# Altium PCB hdmi.PcbDoc
Units mm, origin at the board's own origin, x right, y up, seen from the top; angles counter-clockwise.
Board outline 51.37 x 51.66 mm, 2 copper layers (Top Layer, Bottom Layer); 54 components, 43 nets, 112 pads, 0 vias.
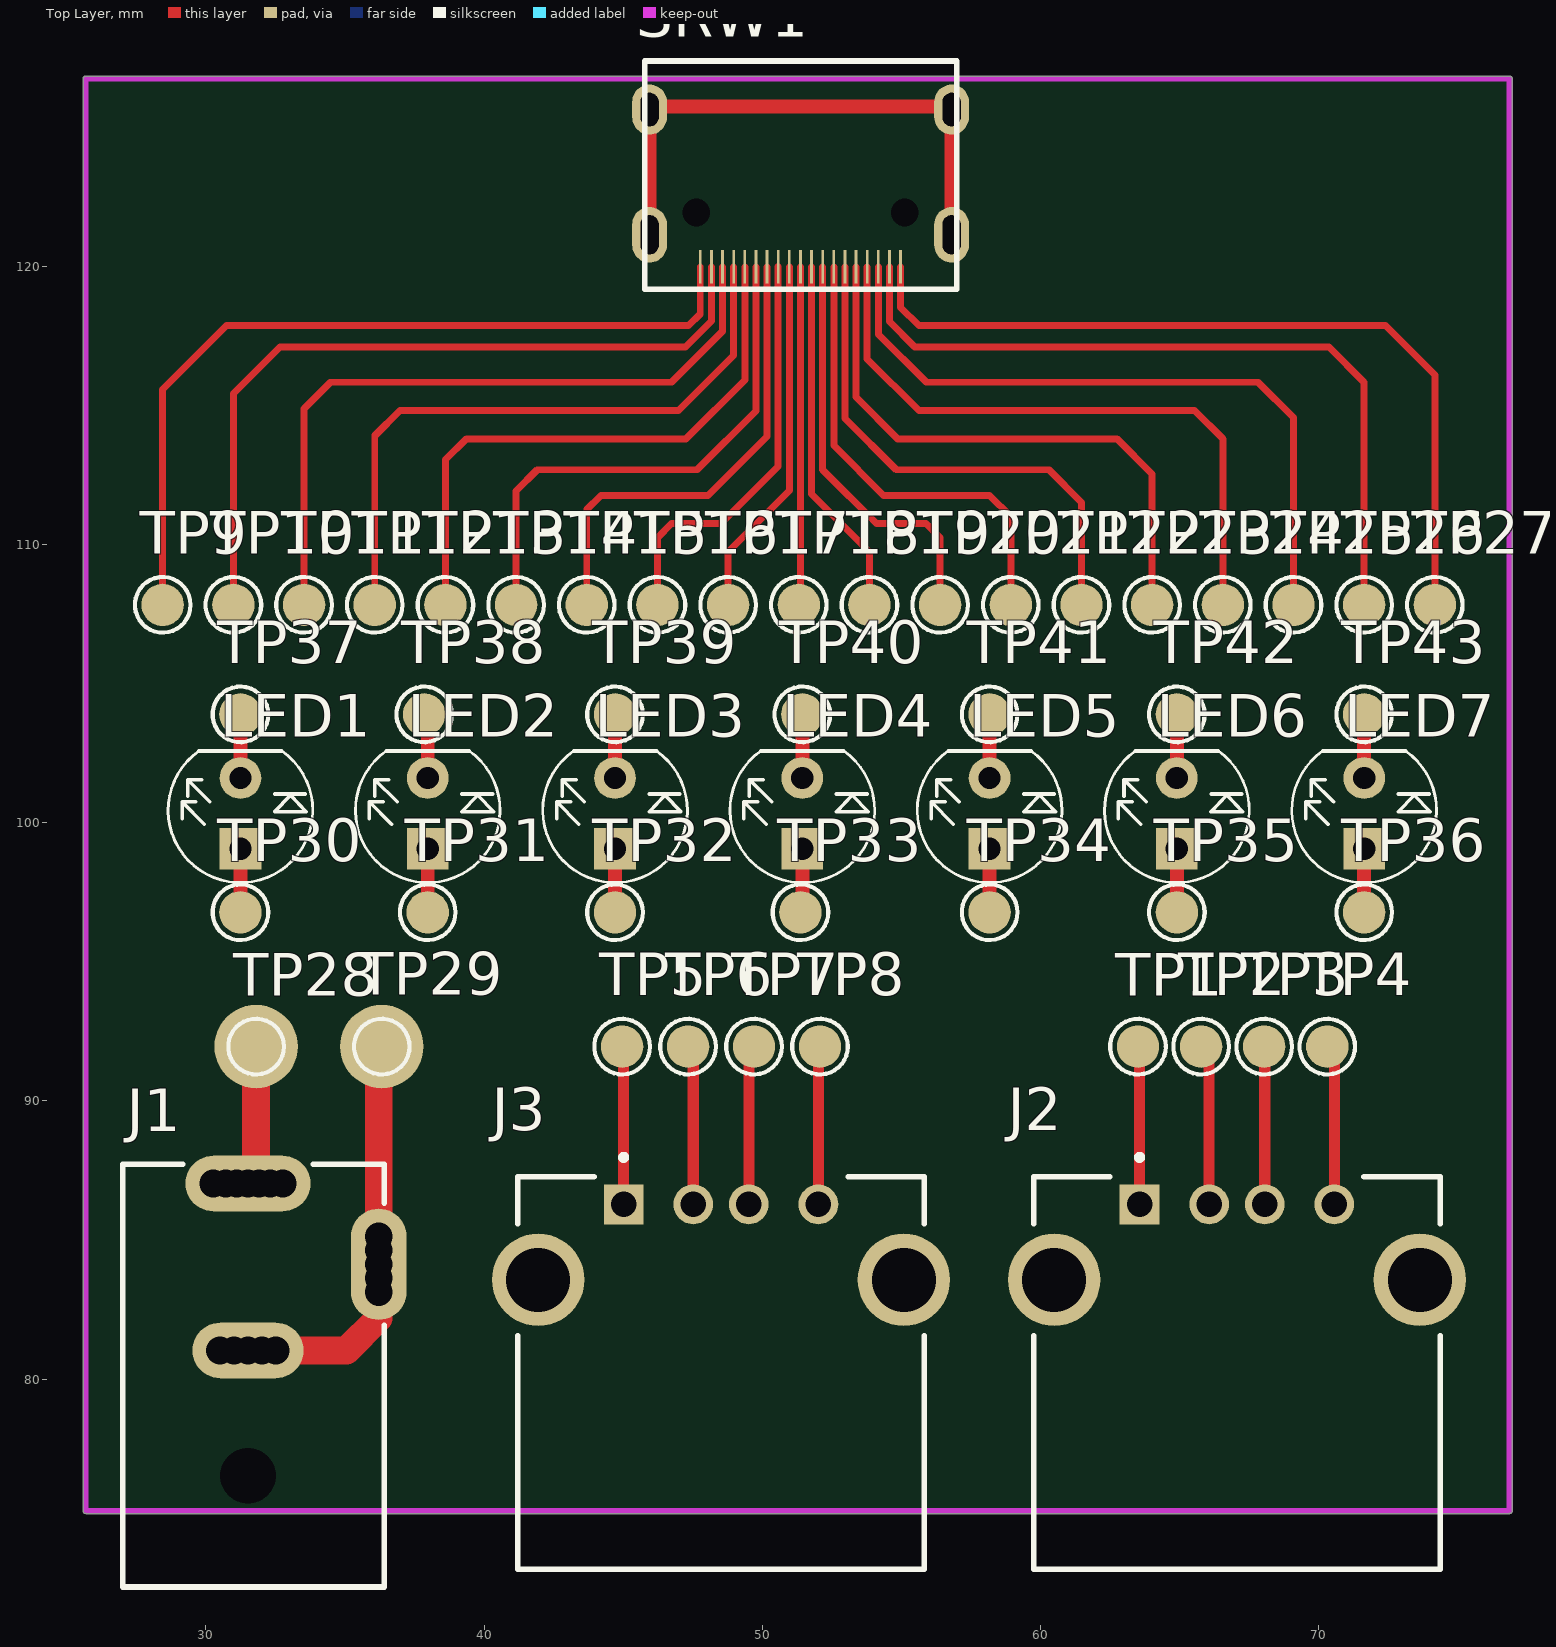
[diagram p0: Top Layer view]
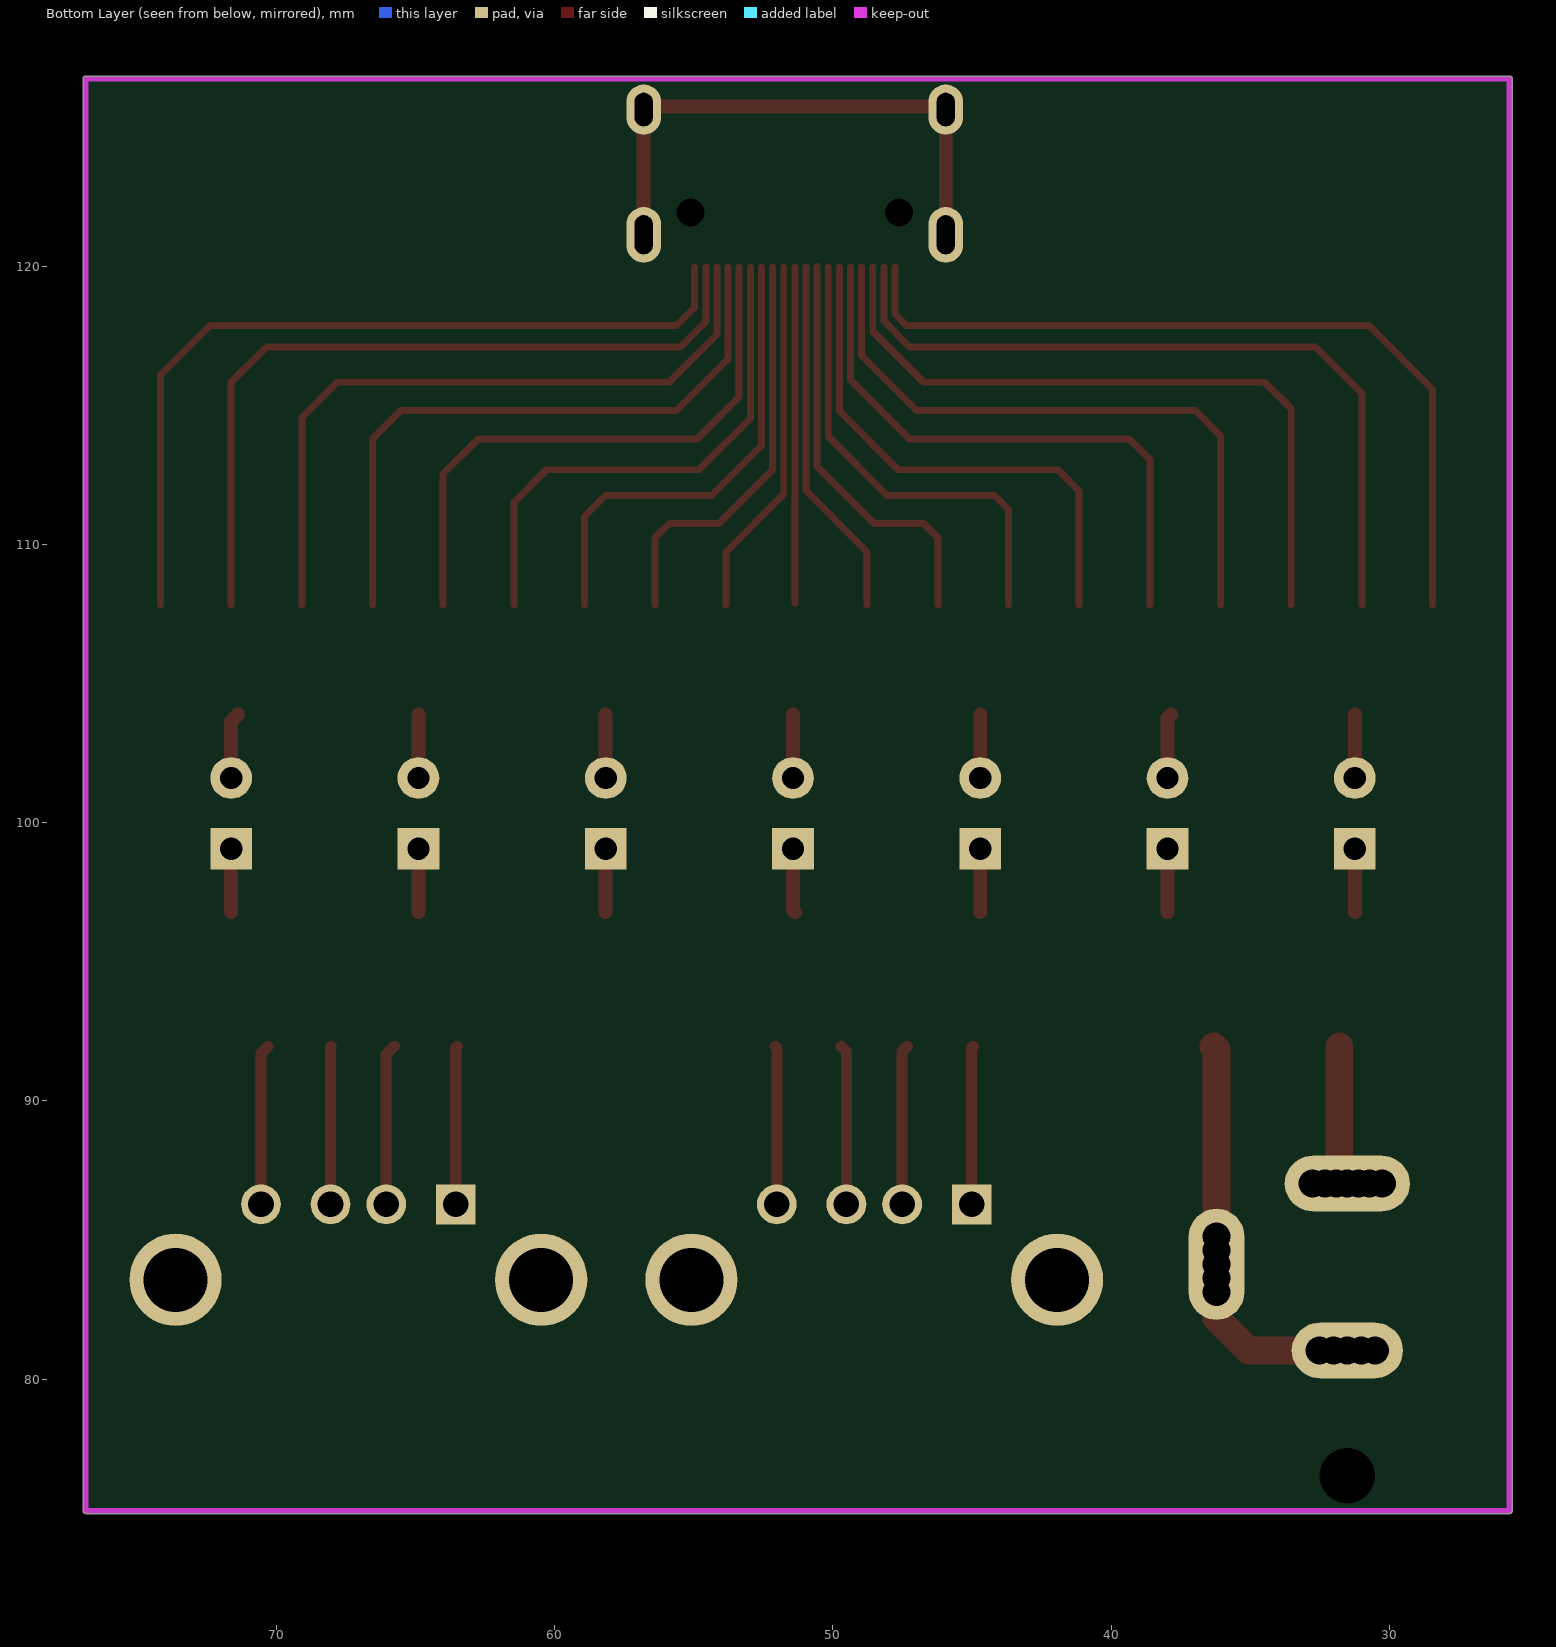
[diagram p1: Bottom Layer view, seen from below]
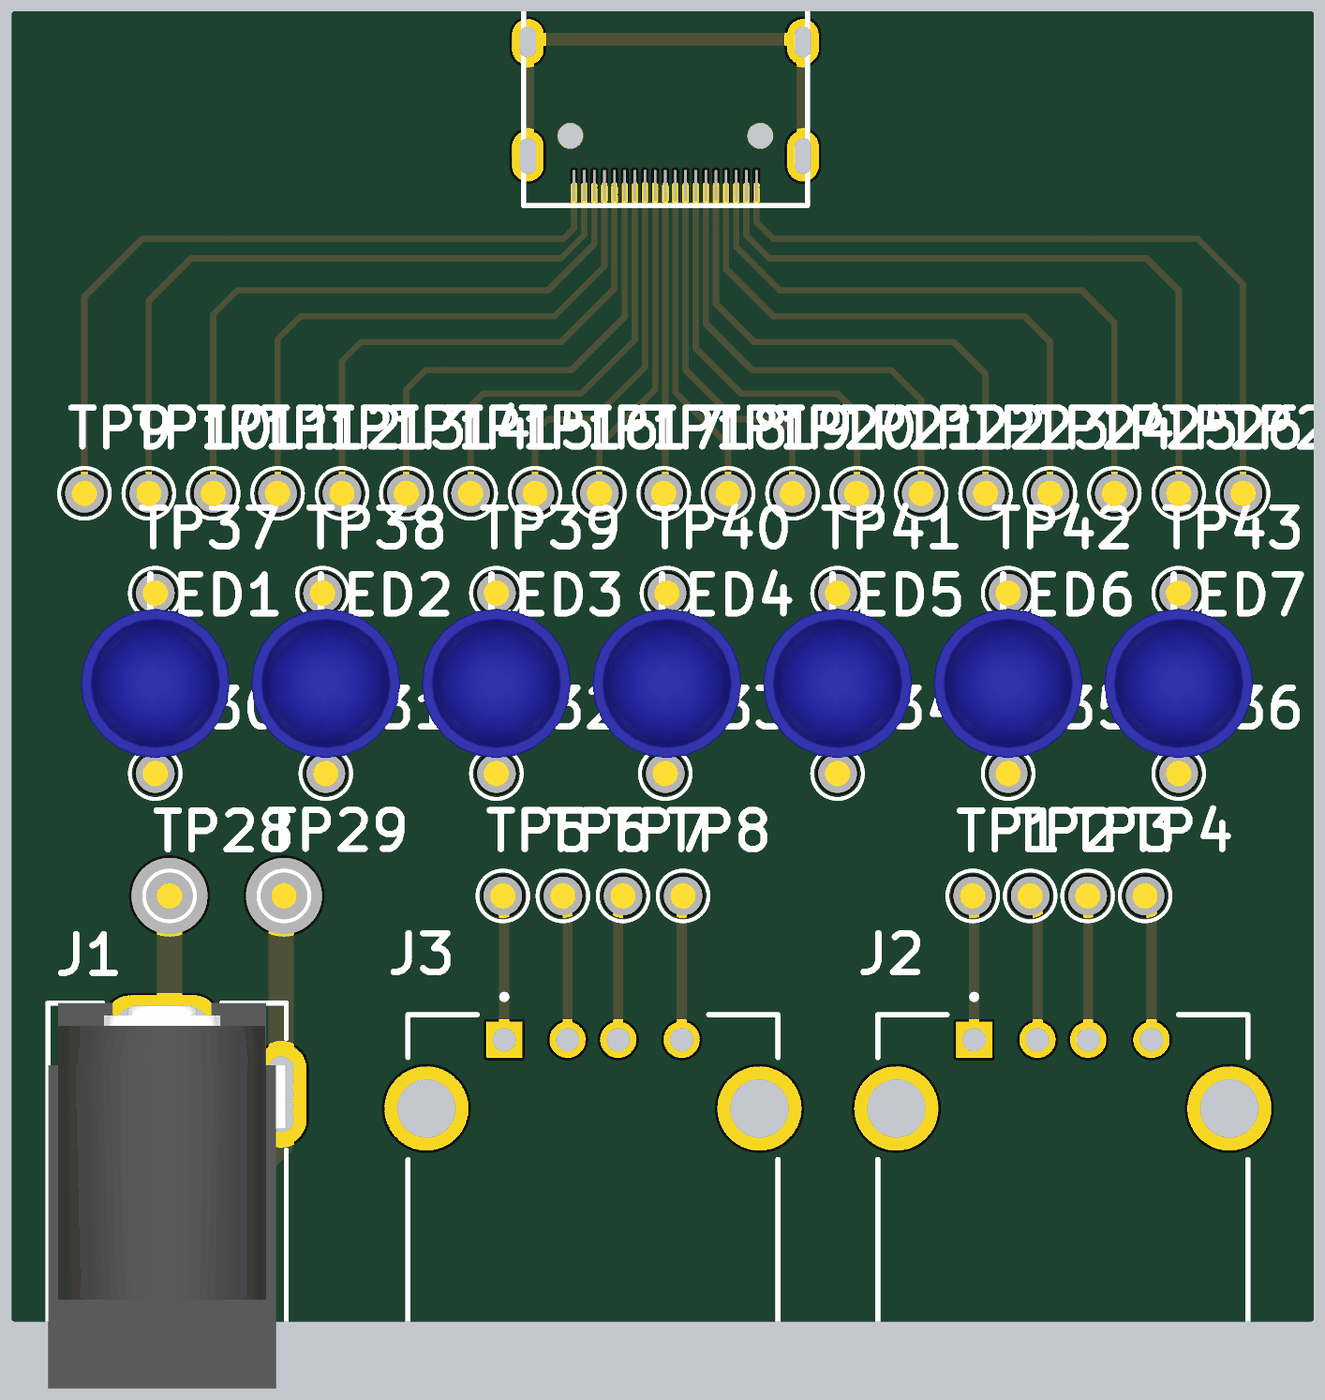
[diagram p2: 3D render of the assembled board from above, using the file's embedded part models]

## Layer stack, top to bottom
Top Solder: solder mask 0.0102, Solder Resist, Dk 3.5
Top Layer: signal copper 0.0356
Dielectric 1: dielectric 0.32, FR-4, Dk 4.8
Bottom Layer: signal copper 0.0356
Bottom Solder: solder mask 0.0102, Solder Resist, Dk 3.5

## Board outline
25.685,75.166 cw(c25.685,75.267) 25.584,75.267 25.584,126.725 cw(c25.685,126.725) 25.685,126.826 76.85,126.826 cw(c76.85,126.725) 76.951,126.725 76.951,75.267 cw(c76.85,75.267) 76.85,75.166 cw(c76.85,75.267) 76.85,75.166 cw(c76.85,75.267) 76.85,75.166

## Design rules (kind name [scope] priority, off if disabled: settings)
Clearance [All] p1: gap=0.1 ignorepadtopadclearanceinfootprint=FALSE except(0.7: Arc-Poly Track-Poly SMDPad-Poly THPad-Poly Via-Poly Fill-Poly Poly-Poly)
PolygonConnect [All] p1: connectstyle=Relief reliefconductorwidth=0.254 reliefentries=4 polygonreliefangle="90 Angle" airgapwidth=0.254
RoutingVias [All] p1: holewidth=0.711 width=1.27 viastyle="Through Hole" minholewidth=0.711 minwidth=1.27 maxholewidth=0.711 maxwidth=1.27
SolderMaskExpansion [All] p1: expansion=0.102
Width [All] p1: maxlimit=10 minlimit=0.1 preferedwidth=0.1
30 further rules are at their usual default settings.

## Components (designator, comment, footprint, x,y, rotation, side; value= is the part's Value field where it differs from the comment)
J1 "Power jack" "Power Jack" 33.237,81.776 r90 top
J2 "USB-A-S-X-X-TH" SAMTEC_USB-A-S-X-X-TH 67.056,83.566 r0 top
J3 "USB-A-S-X-X-TH" SAMTEC_USB-A-S-X-X-TH 48.514,83.566 r0 top
LED1 "LED 2PIN" "LED 5mm" 31.242,100.33 r90 top
LED2 "LED 2PIN" "LED 5mm" 37.973,100.33 r90 top
LED3 "LED 2PIN" "LED 5mm" 44.704,100.33 r90 top
LED4 "LED 2PIN" "LED 5mm" 51.435,100.33 r90 top
LED5 "LED 2PIN" "LED 5mm" 58.166,100.33 r90 top
LED6 "LED 2PIN" "LED 5mm" 64.897,100.33 r90 top
LED7 "LED 2PIN" "LED 5mm" 71.628,100.33 r90 top
SRW1 "Screw" "mini hdmi socket" 56.978,127.368 r180 top
TP1 "TEST POINT" "Test Point On Top"#1 63.5,91.948 r0 top
TP2 "TEST POINT" "Test Point On Top"#1 65.767,91.948 r0 top
TP3 "TEST POINT" "Test Point On Top"#1 68.035,91.948 r0 top
TP4 "TEST POINT" "Test Point On Top"#1 70.302,91.948 r0 top
TP5 "TEST POINT" "Test Point On Top"#1 44.958,91.948 r0 top
TP6 "TEST POINT" "Test Point On Top"#1 47.329,91.948 r0 top
TP7 "TEST POINT" "Test Point On Top"#1 49.699,91.948 r0 top
TP8 "TEST POINT" "Test Point On Top"#1 52.07,91.948 r0 top
TP9 "TEST POINT" "Test Point On Top"#1 28.448,107.823 r0 top
TP10 "TEST POINT" "Test Point On Top"#1 30.988,107.823 r90 top
TP11 "TEST POINT" "Test Point On Top"#1 33.528,107.823 r90 top
TP12 "TEST POINT" "Test Point On Top"#1 36.068,107.823 r90 top
TP13 "TEST POINT" "Test Point On Top"#1 38.608,107.823 r90 top
TP14 "TEST POINT" "Test Point On Top"#1 41.148,107.823 r90 top
TP15 "TEST POINT" "Test Point On Top"#1 43.688,107.823 r90 top
TP16 "TEST POINT" "Test Point On Top"#1 46.228,107.823 r90 top
TP17 "TEST POINT" "Test Point On Top"#1 48.768,107.823 r90 top
TP18 "TEST POINT" "Test Point On Top"#1 51.308,107.823 r90 top
TP19 "TEST POINT" "Test Point On Top"#1 53.848,107.823 r90 top
TP20 "TEST POINT" "Test Point On Top"#1 56.388,107.823 r90 top
TP21 "TEST POINT" "Test Point On Top"#1 58.928,107.823 r90 top
TP22 "TEST POINT" "Test Point On Top"#1 61.468,107.823 r90 top
TP23 "TEST POINT" "Test Point On Top"#1 64.008,107.823 r90 top
TP24 "TEST POINT" "Test Point On Top"#1 66.548,107.823 r90 top
TP25 "TEST POINT" "Test Point On Top"#1 69.088,107.823 r90 top
TP26 "TEST POINT" "Test Point On Top"#1 71.628,107.823 r90 top
TP27 "TEST POINT" "Test Point On Top"#1 74.168,107.823 r90 top
TP28 "TEST POINT" "Test Point On Top"#2 31.804,91.948 r90 top
TP29 "TEST POINT" "Test Point On Top"#2 36.322,91.948 r90 top
TP30 "TEST POINT" "Test Point On Top"#1 31.242,96.774 r90 top
TP31 "TEST POINT" "Test Point On Top"#1 37.973,96.774 r90 top
TP32 "TEST POINT" "Test Point On Top"#1 44.704,96.774 r90 top
TP33 "TEST POINT" "Test Point On Top"#1 51.368,96.774 r90 top
TP34 "TEST POINT" "Test Point On Top"#1 58.166,96.774 r90 top
TP35 "TEST POINT" "Test Point On Top"#1 64.897,96.774 r90 top
TP36 "TEST POINT" "Test Point On Top"#1 71.628,96.774 r90 top
TP37 "TEST POINT" "Test Point On Top"#1 31.242,103.886 r90 top
TP38 "TEST POINT" "Test Point On Top"#1 37.846,103.886 r90 top
TP39 "TEST POINT" "Test Point On Top"#1 44.704,103.886 r90 top
TP40 "TEST POINT" "Test Point On Top"#1 51.435,103.886 r90 top
TP41 "TEST POINT" "Test Point On Top"#1 58.166,103.886 r90 top
TP42 "TEST POINT" "Test Point On Top"#1 64.897,103.886 r90 top
TP43 "TEST POINT" "Test Point On Top"#1 71.628,103.886 r90 top

## Footprints (in the part's own frame and the unit in brackets; to place one, negate y for a bottom-side part, rotate by r counter-clockwise, add the part's x,y. Pads: shape width x height; smd on the part's side, far side on the other; paste and mask are expansions set on the pad)
"LED 5mm" [mm]
  rect 1.5x1.5 hole 0.8: 1(-1.27,0)
  round 1.5 hole 0.8: 2(1.27,0)
  silkscreen extent -2.49,-2.6 2.24,2.6, body extent -2.95,-2.95 2.95,2.95, height 13.6
"mini hdmi socket" [mm]
  rect 0.1x1.2 smd: 1(2.01,7.395) 2(2.41,7.395) 3(2.81,7.395) 4(3.21,7.395) 5(3.61,7.395) 6(4.01,7.395) 7(4.41,7.395) 8(4.81,7.395) 9(5.21,7.395) 10(5.61,7.395) 11(6.01,7.395) 12(6.41,7.389) 13(6.81,7.395) 14(7.21,7.395) 15(7.61,7.395) 16(8.01,7.395) 17(8.41,7.395) 18(8.81,7.395) 19(9.21,7.395)
  round 0.1 hole 1: 5(1.86,5.448) 5(9.357,5.448)
  oval 1.25x1.8 hole 1.2 slot 0.65 at 0 deg: 20(0.177,1.745) 20(11.033,1.745)
  oval 1.25x2 hole 1.4 slot 0.65 at 0 deg: 20(0.177,6.245) 20(11.033,6.245)
  Top Layer lines w0.2: 11.033,6.245 11.015,6.245 ; 1.855,5.448 1.849,5.448 ; 9.362,5.448 9.361,5.448 ; 9.362,5.438 9.361,5.438
  silkscreen extent 0,0 11.2,8.2
"Power Jack" [mm] "Power Adaptor Jack"
  round 1.5 hole 1: 1(5.25,0.475) 1(5.25,0.925) 1(5.25,1.325) 1(5.25,2.125) 1(5.25,2.525) 1(5.25,2.975) 2(-0.75,2.725) 2(-0.75,0.725) 2(-0.75,2.225) 2(-0.75,1.225) 3(1.35,-2.975) 3(1.85,-2.975) 3(2.85,-2.975) 3(3.35,-2.975)
  oval 2x4.5 hole 1: 1(5.25,1.725)
  oval 2x4 hole 1: 2(-0.75,1.725)
  oval 4x2 hole 1: 3(2.35,-2.975)
  round 1.9 hole 2: MH(-5.25,1.725)
  silkscreen extent -9.25,-3.18 5.95,6.23, body extent -9.25,-3.17 5.95,6.23, height 11
SAMTEC_USB-A-S-X-X-TH [mm]
  rect 1.428x1.428 hole 0.92: 01(-3.5,2.71)
  round 1.428 hole 0.92: 02(-1,2.71) 03(1,2.71) 04(3.5,2.71)
  round 3.316 hole 2.3: S1(-6.57,0) S2(6.57,0)
  silkscreen extent -7.3,-10.4 7.3,4.5
"Test Point On Top"#1 [mil]
  round 60 smd: 1(0,0)
  silkscreen extent -39,-39 39,39, body extent -20,-20 20,20, height 256
"Test Point On Top"#2 [mil]
  round 118.11 smd: 1(0,0)
  silkscreen extent -39,-39 39,39, body extent -20,-20 20,20, height 256

## Part data
J2 J3: "USB-A (USB TYPE-A) USB 2.0 Receptacle Connector 4 Position Through Hole, Right Angle", Package=None, Digi-Key_Part_Number=SAM10373-ND, MF=Samtec, MP=USB-A-S-S-W-TH, SnapEDA_Link=https://www.snapeda.com/parts/USB-A-S-S-W-TH/Samtec%20Inc./view-part/423470/?ref=snap, Toby_UK-Purchase-URL=https://snapeda.com/shop?store=Toby+UK&id=423470
J1: ="Power jack"
LED1 LED2 LED3 LED4 LED5 LED6 LED7: ="LED 5mm"
SRW1: ="Screw 3mm"
TP1 TP2 TP3 TP4 TP5 TP6 TP7 TP8 TP9 TP10 TP11 TP12 TP13 TP14 TP15 TP16 TP17 TP18 TP19 TP20 TP21 TP22 TP23 TP24 TP25 TP26 TP27 TP28 TP29 TP30 TP31 TP32 TP33 TP34 TP35 TP36 TP37 TP38 TP39 TP40 TP41 TP42 TP43: ="Test point one pin"

## Nets (pads, with @x,y where several pads share a name; then routed paths per layer and width w, separated by ;. In a path a pad name is that pad's centre, name@x,y a point inside that pad or via, vN(x,y) a via of type N, cw(c..) or ccw(c..) an arc to the next point about the centre after c; other vN are vias at no path point)
GND: J1.2 J1.3 TP29.1 | length 15.5
  Top Layer w1: J1.2@30.512,81.026 31.512,81.026 32.512,81.026 35.052,81.026 36.212,82.186 36.212,83.126 J1.3@36.212,83.626 ; J1.3@36.212,84.126 36.212,84.626 36.212,85.126 36.212,91.838 TP29.1
hdmi_1: TP27.1 | length 29.9
  Top Layer w0.25: 54.968,119.974 54.968,118.514 55.626,117.856 72.39,117.856 74.168,116.078 TP27.1
hdmi_2: TP26.1 | length 27.9
  Top Layer w0.25: 54.568,119.974 54.568,118.002 55.476,117.094 70.358,117.094 71.628,115.824 TP26.1
hdmi_3: TP25.1 | length 25.3
  Top Layer w0.25: 54.168,119.974 54.168,117.547 55.891,115.824 67.818,115.824 69.088,114.554 TP25.1
hdmi_4: TP24.1 | length 23.2
  Top Layer w0.25: 53.768,119.974 53.768,116.666 55.626,114.808 65.532,114.808 66.548,113.792 TP24.1
hdmi_5: TP23.1 | length 21.2
  Top Layer w0.25: 53.368,119.974 53.368,115.288 54.864,113.792 62.738,113.792 64.008,112.522 TP23.1
hdmi_6: TP22.1 | length 18.9
  Top Layer w0.25: 52.968,119.974 52.968,114.522 54.811,112.678 60.296,112.678 61.468,111.506 TP22.1
hdmi_7: TP21.1 | length 17
  Top Layer w0.25: 52.568,119.974 52.568,113.548 54.356,111.76 58.166,111.76 58.928,110.998 TP21.1
hdmi_8: TP20.1 | length 14.9
  Top Layer w0.25: 52.168,119.974 52.168,112.678 54.102,110.744 55.88,110.744 56.388,110.236 TP20.1
hdmi_9: TP19.1 | length 13
  Top Layer w0.25: 51.768,119.974 51.768,111.808 53.848,109.728 TP19.1
hdmi_10: TP18.1 | length 12.2
  Top Layer w0.1: TP18.1 TP18.1@51.368,107.883
  Top Layer w0.25: TP18.1@51.368,107.883 51.368,119.974
hdmi_11: TP17.1 | length 13.1
  Top Layer w0.25: TP17.1 48.768,109.728 50.968,111.928 50.968,119.974
hdmi_12: TP16.1 | length 15
  Top Layer w0.25: TP16.1 46.228,110.236 46.736,110.744 48.514,110.744 50.568,112.798 50.568,119.979
hdmi_13: TP15.1 | length 17.1
  Top Layer w0.25: TP15.1 43.688,111.252 44.196,111.76 48.049,111.76 50.168,113.878 50.168,119.974
hdmi_14: TP14.1 | length 19.1
  Top Layer w0.25: TP14.1 41.148,111.916 41.91,112.678 47.654,112.678 49.768,114.792 49.768,119.974
hdmi_15: TP13.1 | length 21.2
  Top Layer w0.25: TP13.1 38.608,113.04 39.36,113.792 47.26,113.792 49.368,115.899 49.368,119.974
hdmi_16: TP12.1 | length 23.4
  Top Layer w0.25: TP12.1 36.068,113.902 36.974,114.808 46.99,114.808 48.968,116.786 48.968,119.974
hdmi_17: TP11.1 | length 25.6
  Top Layer w0.25: TP11.1 33.528,114.871 34.481,115.824 46.736,115.824 48.568,117.656 48.568,119.974
hdmi_18: TP10.1 | length 27.8
  Top Layer w0.25: TP10.1 30.988,115.421 32.661,117.094 47.244,117.094 48.168,118.018 48.168,119.974
hdmi_19: TP9.1 | length 29.9
  Top Layer w0.25: TP9.1 28.448,115.57 30.734,117.856 47.352,117.856 47.768,118.272 47.768,119.974
NetJ2_01: J2.01 TP1.1 | length 5.7
  Top Layer w0.4: TP1.1 63.556,91.892 J2.01
NetJ2_02: J2.02 TP2.1 | length 5.8
  Top Layer w0.4: TP2.1 66.056,91.659 J2.02
NetJ2_03: J2.03 TP3.1 | length 5.7
  Top Layer w0.4: TP3.1 68.056,91.927 J2.03
NetJ2_04: J2.04 TP4.1 | length 5.8
  Top Layer w0.4: TP4.1 70.556,91.694 J2.04
NetJ3_01: J3.01 TP5.1 | length 5.7
  Top Layer w0.4: TP5.1 45.014,91.892 J3.01
NetJ3_02: J3.02 TP6.1 | length 5.7
  Top Layer w0.4: TP6.1 47.514,91.763 J3.02
NetJ3_03: J3.03 TP7.1 | length 5.7
  Top Layer w0.4: J3.03 49.514,91.763 TP7.1
NetJ3_04: J3.04 TP8.1 | length 5.7
  Top Layer w0.4: J3.04 52.014,91.892 TP8.1
NetLED1_1: LED1.1 TP30.1 | length 2.3
  Top Layer w0.5: TP30.1 LED1.1
NetLED1_2: LED1.2 TP37.1 | length 2.3
  Top Layer w0.5: LED1.2 TP37.1
NetLED2_1: LED2.1 TP31.1 | length 2.3
  Top Layer w0.5: TP31.1 LED2.1
NetLED2_2: LED2.2 TP38.1 | length 2.3
  Top Layer w0.5: TP38.1 37.973,103.759 LED2.2
NetLED3_1: LED3.1 TP32.1 | length 2.3
  Top Layer w0.5: TP32.1 LED3.1
NetLED3_2: LED3.2 TP39.1 | length 2.3
  Top Layer w0.5: LED3.2 TP39.1
NetLED4_1: LED4.1 TP33.1 | length 2.3
  Top Layer w0.5: TP33.1 51.435,96.841 LED4.1
NetLED4_2: LED4.2 TP40.1 | length 2.3
  Top Layer w0.5: LED4.2 TP40.1
NetLED5_1: LED5.1 TP34.1 | length 2.3
  Top Layer w0.5: TP34.1 LED5.1
NetLED5_2: LED5.2 TP41.1 | length 2.3
  Top Layer w0.5: LED5.2 TP41.1
NetLED6_1: LED6.1 TP35.1 | length 2.3
  Top Layer w0.5: TP35.1 LED6.1
NetLED6_2: LED6.2 TP42.1 | length 2.3
  Top Layer w0.5: LED6.2 TP42.1
NetLED7_1: LED7.1 TP36.1 | length 2.3
  Top Layer w0.5: TP36.1 LED7.1
NetLED7_2: LED7.2 TP43.1 | length 2.4
  Top Layer w0.5: TP43.1@71.374,103.886 71.628,103.632 LED7.2
VIN: J1.1 TP28.1 | length 5.1
  Top Layer w1: TP28.1 31.804,87.534 J1.1@32.312,87.026
pads on no net: J1.MH J2.S1 J2.S2 J3.S1 J3.S2 SRW1.1 SRW1.2 SRW1.3 SRW1.4 SRW1.5 SRW1.6 SRW1.7 SRW1.8 SRW1.9 SRW1.10 SRW1.11 SRW1.12 SRW1.13 SRW1.14 SRW1.15 SRW1.16 SRW1.17 SRW1.18 SRW1.19 SRW1.20
copper on no net: | length 21
  Top Layer w0.5: 45.945,120.668 45.945,125.623 ; 45.945,125.193 45.945,125.73 56.694,125.73 56.801,125.623 56.801,121.063

## Keep-outs
Keep-Out Layer:
  lines w0.2: 76.85,75.267 76.85,126.725 25.685,126.725 25.685,75.267 76.85,75.267 ; 76.85,75.267 76.85,75.267